# EAGLE board CC_Chompi_Rev4_1X1 (EAGLE 9.6.2), part 1 of 3
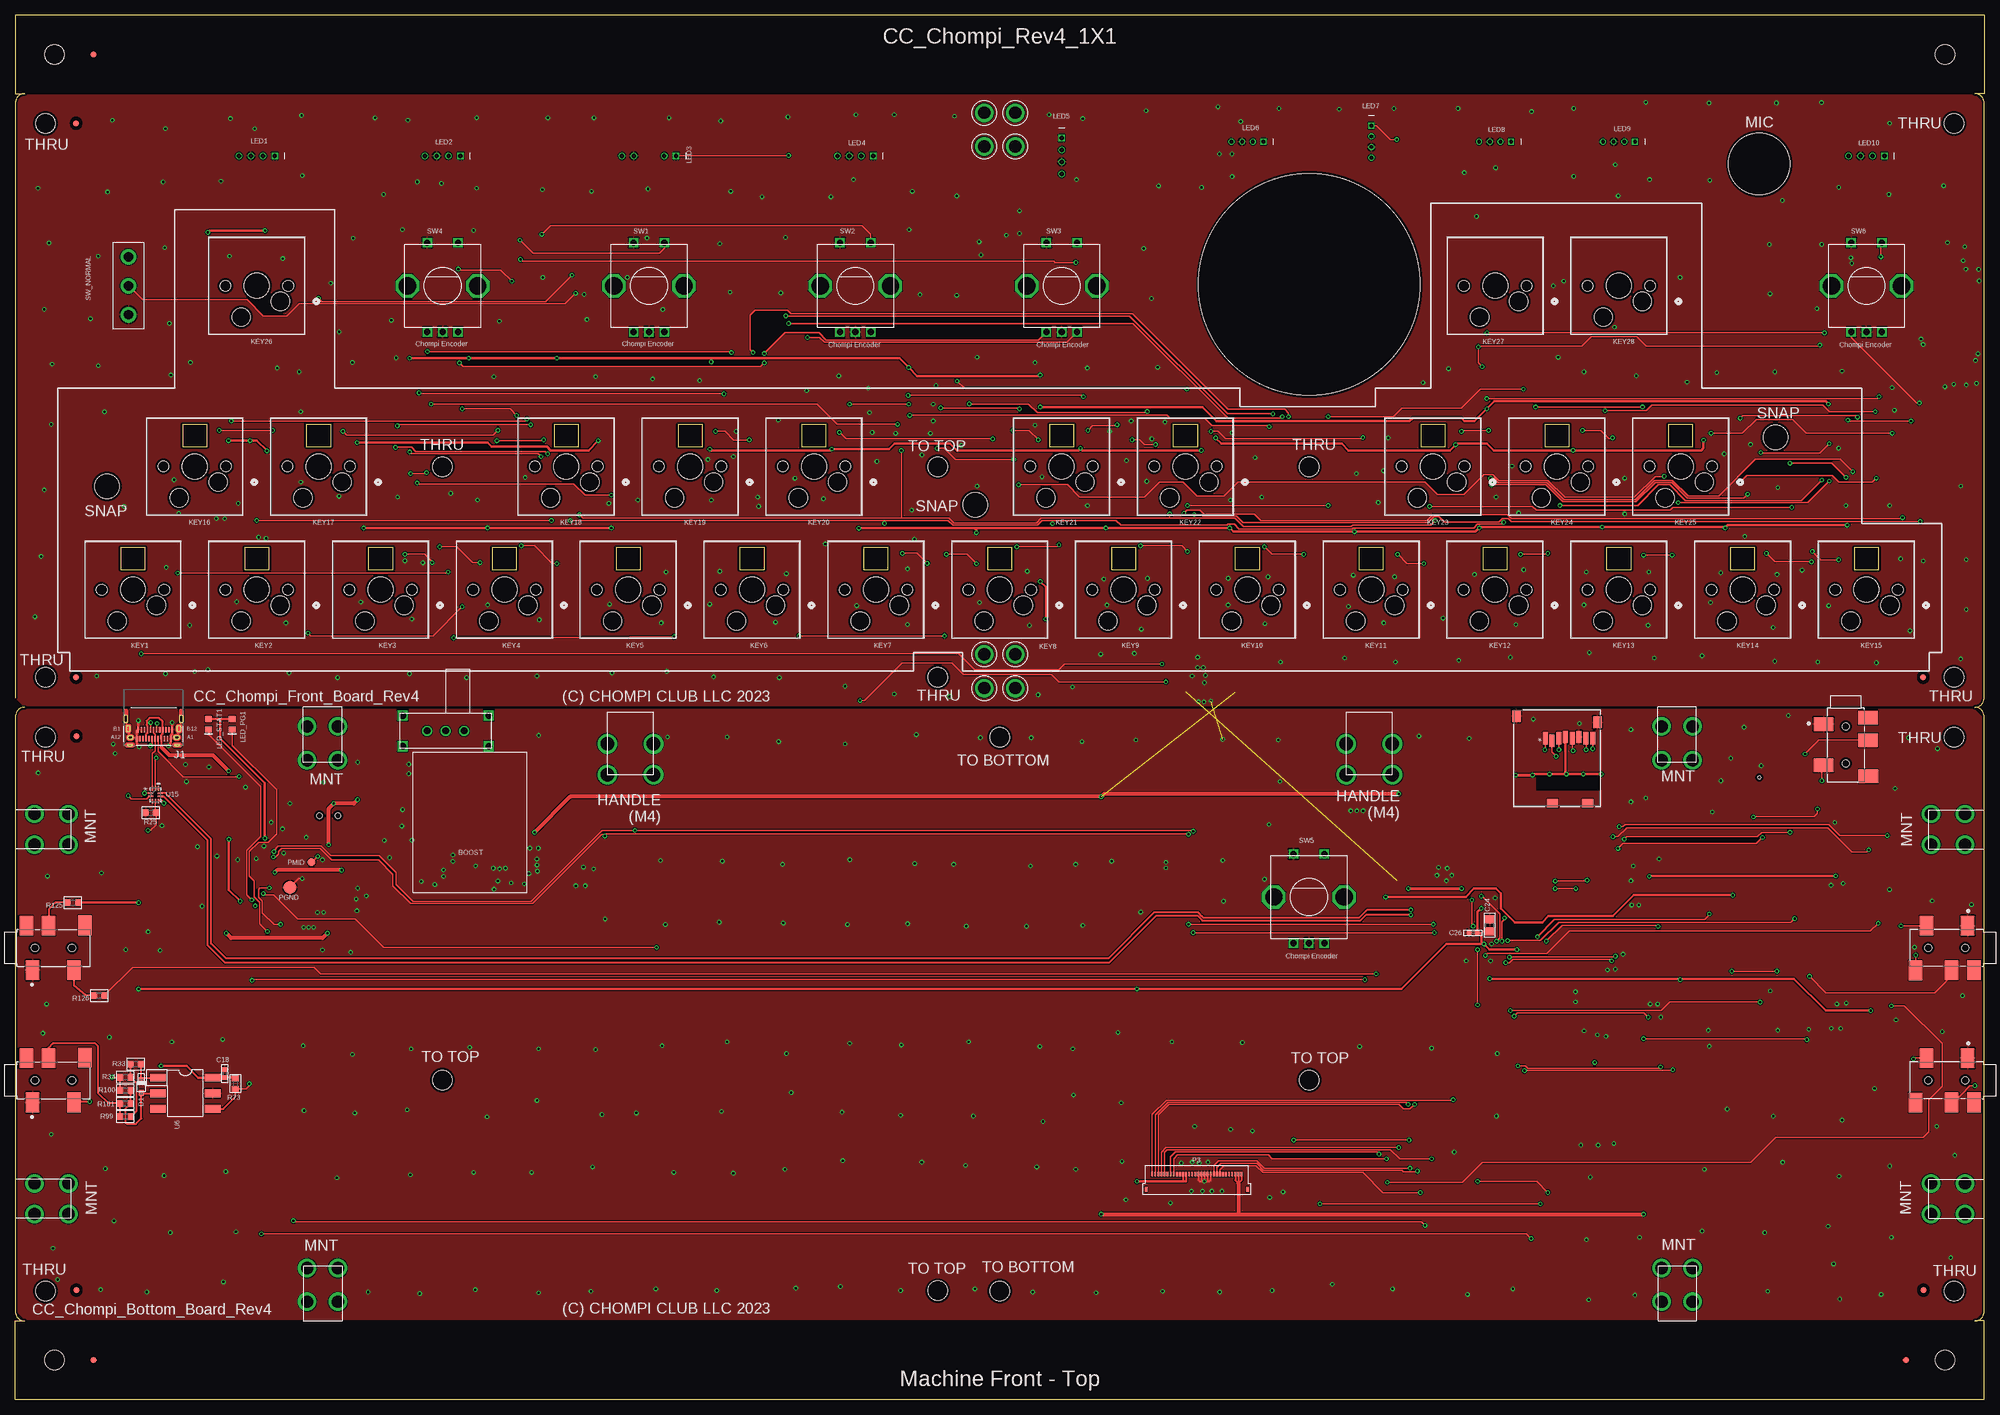
[diagram p0: board, top side]
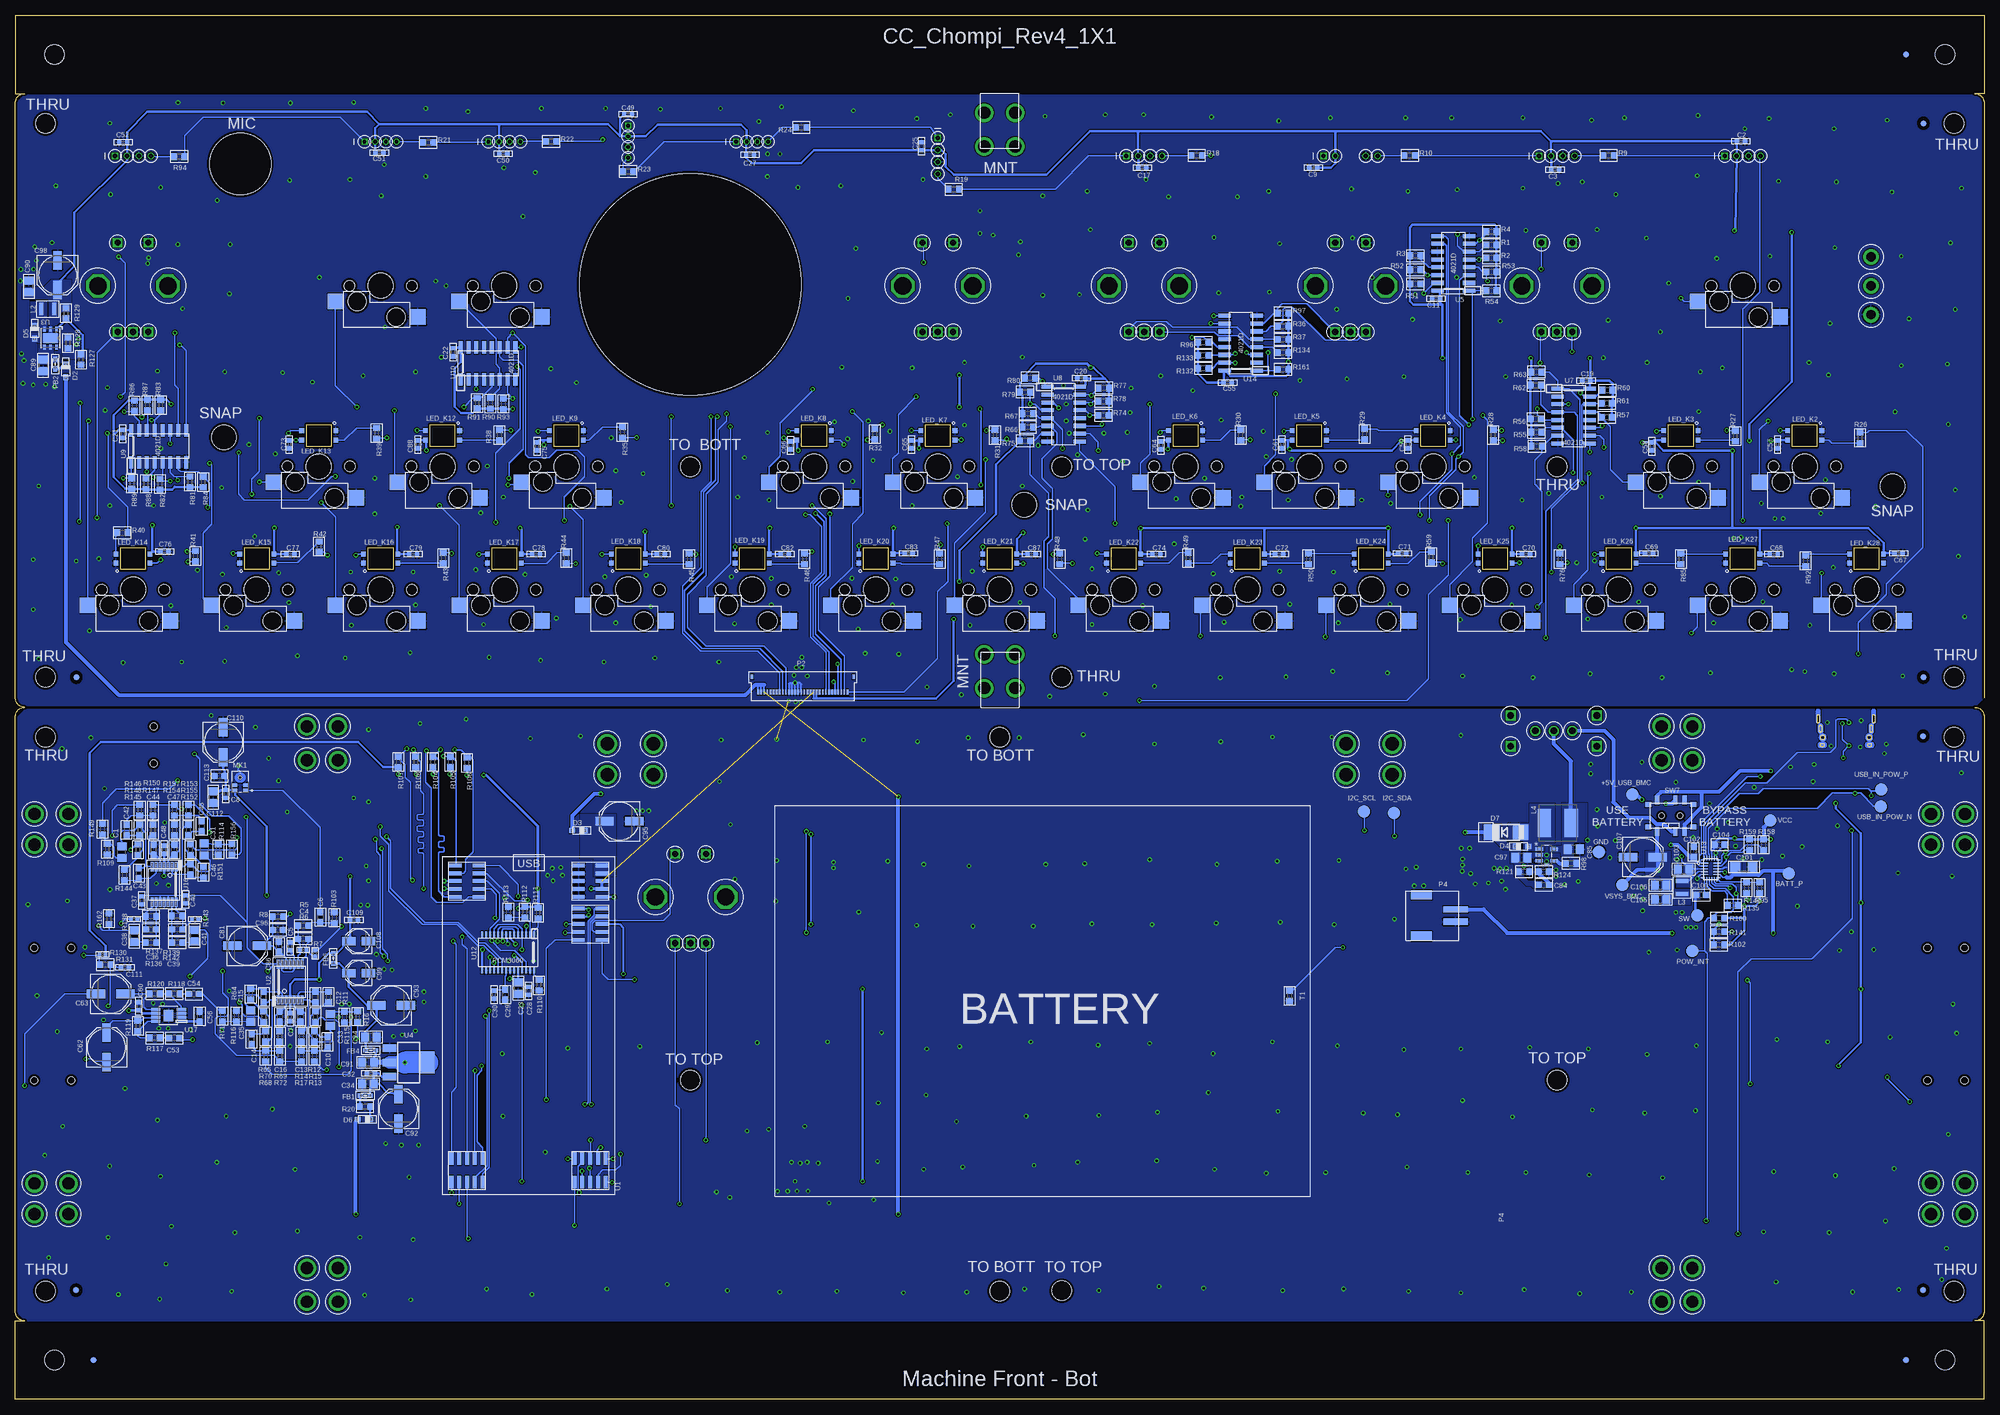
[diagram p1: board, bottom side, seen from below]

Size 319.75 x 224.76 mm. Coordinates in mm from the lower left corner, seen from the top.
Outline: 0,113.88 0,210.56 arc-90 1.5,212.06 0,212.06 0,224.76 319.75,224.76 319.75,212.06 318.25,212.06 arc-90 319.75,210.56 319.75,113.88 arc-90 318.25,112.38 arc-90 319.75,110.88 319.75,14.2 arc-90 318.25,12.7 319.75,12.7 319.75,0 0,0 0,12.7 1.5,12.7 arc-90 0,14.2 0,110.88 arc-90 1.5,112.38
Copper layers (1*16): Top 0.0356mm / dielectric 1.5011mm / Bottom 0.0356mm
Design rules "ES_DRC_MaskedVias *": minimum track width 6mil, minimum drill 13mil, track to track 6mil, track to pad 6mil, pad to pad 6mil, via to via 6mil, smd to smd 6mil, copper to edge 15mil, drill to drill 6mil, minimum pad ring 7mil, minimum via ring 7mil, stop-mask expansion 3mil, vias tented up to drill 16mil, thermal gap 10mil
Net classes: 0 default: width 0.102 mm, drill 0.2 mm
Holes 3.2 mm at 4.87,107.54 4.87,17.54 314.87,17.54 314.87,107.54 69.37,51.79 210.15,51.79 149.83,17.6 4.87,207.22 4.87,117.22 314.87,117.22 314.87,207.22 69.37,151.47 149.82,151.47 210.15,151.47 149.81,117.23 159.87,107.54 159.87,17.54
Holes 36 mm at 210.16,181.09
Holes 10 mm at 283.23,200.63
Holes 4 mm at 14.87,148.24 155.87,145.24 285.87,156.24
Holes 3.17 mm at 6.35,6.35 313.4,6.35 6.35,218.41 313.4,218.41

## Footprints (pad centres in the part's own frame; a part is rotated, then mirrored left to right if it is on the bottom)
C0805 = smd 1.3 x 1.5: 1 -0.95,0; 2 0.95,0
C0402 = smd 0.7 x 0.9: 1 -0.65,0; 2 0.65,0
C0603 = smd 1.1 x 1: 1 -0.85,0; 2 0.85,0
PANASONIC_D = smd 3 x 1.4: + 2.4,0; - -2.4,0
PANASONIC_B = smd 2.2 x 1.4: + 1.6,0; - -1.6,0
C1206 = smd 1.6 x 1.8: 1 -1.4,0; 2 1.4,0
SOD-323F = smd 1 x 0.8: A 1,0; C -1,0
SMADIODE = smd 2.54 x 2.54: A 2.349,0; C -2.349,0
WUERTH-ELEKTRONIK_0603 = smd 0.85 x 0.7: 1 -0.9,0; 2 0.7,0
FIDUCIAL_1MM = smd 1 x 1: 1 0,0
M4_SCREW_TERMINAL = drill 2.2: P$1 -3.75,-1.75; P$2 3.75,-1.75; P$3 -3.75,3.25; P$4 3.75,3.25
ADAM_USB-C31-S-RA-CS2-SMT-BK-T/R = smd 0.25 x 0.9: A1 -2.75,0.23; A2 -2.25,0.23; A3 -1.75,0.23; A4 -1.25,0.23; A5 -0.75,0.23; A6 -0.25,0.23; A7 0.25,0.23; A8 0.75,0.23; A9 1.25,0.23; A10 1.75,0.23; A11 2.25,0.23; A12 2.75,0.23; B1 2.5,-1.26; B2 2,-1.26; B3 1.5,-1.26; B4 1,-1.26; B5 0.5,-1.26; B6 0,-1.26; B7 -0.5,-1.26; B8 -1,-1.26; B9 -1.5,-1.26; B10 -2,-1.26; B11 -2.5,-1.26; B12 -3,-1.26
CUI_SJ2-35863B1-SMT-TR = smd 2.2 x 3.2: 1 -3.4,-3.6; 2 3.3,-3.6; 3 -0.8,3.6; 4 -4.4,3.6; 10 5.1,3.65 | hole 1.2: -3,0; 3,0
CPG151101S11 = smd 2.55 x 2.5: P$1 -3.525,0; P$2 9.875,-2.54 | hole 3: 6.35,-2.54; 0,0 | hole 4.089: 3.81,2.54 | hole 1.753: 8.89,2.54; -1.27,2.54
I1008 = smd 0.7 x 2: 1 1.05,0; 2 -1.05,0
MPL-SE6040 = smd 4.5 x 2.15: P$1 0,2.175; P$2 0,-2.175
WS2812D-F8 = drill 0.7: DIN -2.9,0; GND -0.967,0; VDD 0.967,0 | drill 0.7 square: DOUT 2.9,0
WS2812D-F8-SPLIT = drill 0.7: DIN -4.4,0; GND -2.467,0; VDD 2.467,0 | drill 0.7 square: DOUT 4.4,0
WS2812D-F5 = drill 0.6: DIN -2.6,0; GND -0.867,0; VDD 0.867,0 | drill 0.6 square: DOUT 2.6,0
IN-PI32TAR = smd 0.75 x 0.82: DIN -2.775,0.755; DO 2.775,-0.755; GND -2.775,-0.755; VDD 2.775,0.755
DIODE_0603 = smd 1 x 1.1: ANODE 0.85,0; CATHODE -0.85,0
MIC_MP23ABS1TR = smd 0.725 x 0.522: 1 -0.838,1.364; 2 -0.838,0.542; 4 0.838,0.542; 5 0.838,1.364 | smd 0.1 x 0.1: 3 0,-1.373 | hole 0.5: 0,-0.71
FH34SRJ-30S-0-5SH-50 = smd 0.3 x 0.8: P$1 -7.25,0; P$2 -6.75,0; P$3 -6.25,0; P$4 -5.75,0; P$5 -5.25,0; P$6 -4.75,0; P$7 -4.25,0; P$8 -3.75,0; P$9 -3.25,0; P$10 -2.75,0; P$11 -2.25,0; P$12 -1.75,0; P$13 -1.25,0; P$14 -0.75,0; P$15 -0.25,0; P$16 0.25,0; P$17 0.75,0; P$18 1.25,0; P$19 1.75,0; P$20 2.25,0; P$21 2.75,0; P$22 3.25,0; P$23 3.75,0; P$24 4.25,0; P$25 4.75,0; P$26 5.25,0; P$27 5.75,0; P$28 6.25,0; P$29 6.75,0; P$30 7.25,0 | smd 0.4 x 0.8: P$31 -8.25,-2.5; P$32 8.25,-2.5
S2B-PH-SM4-TB(LF)(SN) = smd 1 x 4: P_1 -1,-1.05; P_2 1,-1.05 | smd 1.5 x 3.4: P_3 -3.35,4.5; P_4 3.35,4.5
MEM2061-01-188-00-A_GCT = smd 1.803 x 1.397: 9 -4.95,7.322; 10 0.75,7.322 | smd 1.397 x 1.905: 11 -6.55,-5.828; 12 6.6,-6.828 | smd 0.813 x 2.007: P1 1.94,-3.228; P2 0.84,-2.828; P3 -0.26,-3.228; P4 -1.36,-3.428; P5 -2.46,-3.228; P6 -3.56,-3.428; P7 -4.66,-3.228; P8 -5.76,-3.228
R0603 = smd 1 x 1.1: 1 -0.85,0; 2 0.85,0
R0402 = smd 0.6 x 0.7: 1 -0.5,0; 2 0.5,0
SK-12F17-G7 = drill 1.1: P$1 0,0; P$2 -3,0; P$3 3,0 | drill 1.1 square: P$4 -7,2.5; P$5 7,2.5; P$7 -7,-2.5; P$8 7,-2.5
T34069_OLD = drill 2: P$1 -2.5,2.75; P$2 2.5,2.75; P$3 -2.5,-2.75; P$4 2.5,-2.75
T34069_OLD_ADJ2 = drill 2: P$1 -2.5,2.75; P$2 2.5,2.75; P$3 -2.5,-2.75; P$4 2.5,-2.75
T34069_OLD_ADJ1 = drill 2: P$1 -2.5,2.75; P$2 2.5,2.75; P$3 -2.5,-2.75; P$4 2.5,-2.75
PEC11_SILK = drill 1 pad 1.524 square: A -2.5,-7.5; B 2.5,-7.5; C 0,-7.5; D -2.5,7; E 2.5,7 | drill 2.8 pad 3.81 octagon: GND1 -5.7,0; GND2 5.7,0
MSS6-V-T/R = smd 1 x 0.8: 1 -3.65,1.8; 2 3.65,1.8; 3 -3.65,-1.8; 4 3.65,-1.8 | smd 0.7 x 1.5: A -2.25,2.55; B 0.75,2.55; C 2.25,2.55; D -2.25,-2.55; E 0.75,-2.55; F 2.25,-2.55 | hole 0.9: -1.5,0; 1.5,0
ES_100SP1T6B11M2QEH_SMALL = drill 1.5 pad 2.54: O -4.699,0; P 0,0; S 4.699,0
TP20R = smd 2 x 2: TP 0,0
TP13R = smd 1.3 x 1.3: TP 0,0
ES_DAISY_SEED2_DFM_REV1 = smd 0.65 x 1.98: A1 53.54,2.095; A2 52.27,2.095; A3 51,2.095; A4 49.73,2.095; A5 48.46,2.095; A6 48.46,5.905; A7 49.73,5.905; A8 51,5.905; A9 52.27,5.905; A10 53.54,5.905; B1 46.54,2.095; B2 45.27,2.095; B3 44,2.095; B4 42.73,2.095; B5 41.46,2.095; B6 41.46,5.905; B7 42.73,5.905; B8 44,5.905; B9 45.27,5.905; B10 46.54,5.905; E1 53.54,22.095; E2 52.27,22.095; E3 51,22.095; E4 49.73,22.095; E5 48.46,22.095; E6 48.46,25.905; E7 49.73,25.905; E8 51,25.905; E9 52.27,25.905; E10 53.54,25.905 | smd 1.98 x 0.65: C1 5.905,6.54; C2 5.905,5.27; C3 5.905,4; C4 5.905,2.73; C5 5.905,1.46; C6 2.095,1.46; C7 2.095,2.73; C8 2.095,4; C9 2.095,5.27; C10 2.095,6.54; D1 5.905,26.54; D2 5.905,25.27; D3 5.905,24; D4 5.905,22.73; D5 5.905,21.46; D6 2.095,21.46; D7 2.095,22.73; D8 2.095,24; D9 2.095,25.27; D10 2.095,26.54
TSSOP-14 = smd 0.45 x 1.5: 1 -1.95,-2.9; 2 -1.3,-2.9; 3 -0.65,-2.9; 4 0,-2.9; 5 0.65,-2.9; 6 1.3,-2.9; 7 1.95,-2.9; 8 1.95,2.9; 9 1.3,2.9; 10 0.65,2.9; 11 0,2.9; 12 -0.65,2.9; 13 -1.3,2.9; 14 -1.95,2.9
DFN06_3X3_STM = smd 0.813 x 0.406: 1 -1.448,0.95; 2 -1.448,0; 3 -1.448,-0.95; 4 1.448,-0.95; 5 1.448,0; 6 1.448,0.95 | smd 1.6 x 2.413: 7 0,0
SOT223 = smd 2.235 x 1.219: 1 3.099,-2.311; 2 3.099,0; 3 3.099,2.311 | smd 2.2 x 3.6: TAB -3.099,0
SO-16 = smd 0.66 x 2.032: 1 -4.445,-2.591; 2 -3.175,-2.591; 3 -1.905,-2.591; 4 -0.635,-2.591; 5 0.635,-2.591; 6 1.905,-2.591; 7 3.175,-2.591; 8 4.445,-2.591; 9 4.445,2.591; 10 3.175,2.591; 11 1.905,2.591; 12 0.635,2.591; 13 -0.635,2.591; 14 -1.905,2.591; 15 -3.175,2.591; 16 -4.445,2.591
DIL06_GULLWING = smd 1.27 x 2.54: 1 -2.54,-4.445; 2 0,-4.445; 3 2.54,-4.445; 4 2.54,4.445; 5 0,4.445; 6 -2.54,4.445
MF05A = smd 1.27 x 0.559: 1 -1.219,0.953; 2 -1.219,0; 3 -1.219,-0.953; 4 1.219,-0.953; 5 1.219,0.953
TSSOP-28 = smd 0.305 x 0.991: 1 -4.225,-2.918; 2 -3.575,-2.918; 3 -2.925,-2.918; 4 -2.275,-2.918; 5 -1.625,-2.918; 6 -0.975,-2.918; 7 -0.325,-2.918; 8 0.325,-2.918; 9 0.975,-2.918; 10 1.625,-2.918; 11 2.275,-2.918; 12 2.925,-2.918; 13 3.575,-2.918; 14 4.225,-2.918; 15 4.225,2.918; 16 3.575,2.918; 17 2.925,2.918; 18 2.275,2.918; 19 1.625,2.918; 20 0.975,2.918; 21 0.325,2.918; 22 -0.325,2.918; 23 -0.975,2.918; 24 -1.625,2.918; 25 -2.275,2.918; 26 -2.925,2.918; 27 -3.575,2.918; 28 -4.225,2.918
MP2722 = smd 0.2 x 0.7: AGND 0.6,1.7; BST -1,-1.7; CC2 -1,1.7; D+ -0.6,1.7; D- -0.2,1.7; INT -0.2,-1.7; NTC1 0.6,-1.7; PG/NTC2 0.2,-1.7; RST 1,1.7; STAT/IB 1,-1.7; VCC 0.2,1.7; VRNTC -0.6,-1.7 | smd 1.1 x 0.2: BATT 1,0; BATTSNS 1,-0.9; IN -1,0.45; PGND -1,-0.9; PMID -1,0; SCL 1,0.9; SDA 1,0.45; SW -1,-0.45; SYS 1,-0.45 | smd 0.5 x 0.2: BST_2 -1.3,-1.45; CC2_2 -1.3,1.45; RST_2 1.3,1.45; STAT/IB_2 1.3,-1.45 | smd 1.2 x 0.2: CC1 -0.95,0.9
QFN10_1P6X2P1MC_MCH = smd 0.254 x 0.762: 1 0,1.029; 2 -0.508,1.029; 5 -0.508,-1.029; 6 0,-1.029; 7 0.508,-1.029; 10 0.508,1.029 | smd 0.762 x 0.254: 3 -0.775,0.254; 4 -0.775,-0.254; 8 0.775,-0.254; 9 0.775,0.254
MSOP_8_PWRPAD = smd 1.6 x 0.4: 1 -2.095,0.975; 2 -2.095,0.325; 3 -2.095,-0.325; 4 -2.095,-0.975; 5 2.095,-0.975; 6 2.095,-0.325; 7 2.095,0.325; 8 2.095,0.975 | smd 1.57 x 1.89: 9 0,0

## Placement (x,y rotation side)
C1  10UF  [C0805]  302.45,88.82 90 bottom
C2  100NF  [C0402]  39.49,204.29 0 bottom
C3  100NF  [C0402]  69.66,199.72 0 bottom
C4  47PF  [C0603]  273,74.77 180 bottom
C5  100NF  [C0402]  275.13,73.55 270 bottom
C6  1UF  [C0603]  270.23,78.27 270 bottom
C7  100NF  [C0402]  275.15,62.04 270 bottom
C8  100NF  [C0402]  285.59,98.29 270 bottom
C9  100NF  [C0402]  108.95,200 180 bottom
C10  1.5NF  [C0603]  269.04,58.01 90 bottom
C11  100NF  [C0402]  89.02,178.77 180 bottom
C12  470pF  [C0603]  271.02,65.32 90 bottom
C13  470pF  [C0603]  273.46,62.12 270 bottom
C14  1.5NF  [C0603]  281.38,58.46 90 bottom
C15  470pF  [C0603]  279.4,65.32 90 bottom
C16  470pF  [C0603]  276.81,62.12 270 bottom
C17  100NF  [C0402]  136.72,200.02 0 bottom
C18  100NF  [C0402]  34.01,52.88 270 top
C19  100NF  [C0402]  64.64,165.46 180 bottom
C20  100NF  [C0402]  146.63,165.86 180 bottom
C21  100NF  [C0402]  302.31,156.79 270 bottom
C22  100NF  [C0402]  248.66,170.05 270 bottom
C23  10UF  [C0805]  238.06,66.76 270 bottom
C24  10UF  [C0805]  239.45,76.95 90 top
C25  100NF  [C0402]  172.59,203.53 90 bottom
C26  100NF  [C0402]  236.74,75.75 180 top
C27  100NF  [C0402]  200.42,202.16 0 bottom
C28  100NF  [C0402]  236.38,66.3 270 bottom
C29  2.2UF  [C0603]  240.19,65.7 270 bottom
C30  100NF  [C0402]  242.02,65.7 270 bottom
C31  10UF  [C0805]  289.09,89.28 270 bottom
C32  100NF  [C0402]  262.02,52.92 180 bottom
C33  10UF  [C0805]  268.6,61.59 270 bottom
C34  10UF  [C0805]  262.47,51.21 180 bottom
C35  10UF  [C0805]  281.55,62.2 90 bottom
C36  330PF  [C0603]  297.72,76.28 0 bottom
C37  100NF  [C0402]  299.25,81.01 90 bottom
C38  10UF  [C0805]  300.47,75.22 270 bottom
C39  330PF  [C0603]  293.46,76.28 180 bottom
C40  100NF  [C0402]  292.09,81.16 90 bottom
C41  10UF  [C0805]  290.66,75.27 270 bottom
C42  1.5NF  [C0603]  301.69,92.44 270 bottom
C43  470pF  [C0603]  299.71,85.43 270 bottom
C44  470pF  [C0603]  297.27,89.24 90 bottom
C45  1.5NF  [C0603]  289.5,93.05 270 bottom
C46  470pF  [C0603]  291.32,86.04 270 bottom
C47  470pF  [C0603]  293.91,89.24 90 bottom
C48  100NF  [C0402]  295.59,89.24 90 bottom
C49  100NF  [C0402]  220.24,208.71 0 bottom
C50  100NF  [C0402]  240.5,202.31 0 bottom
C51  100NF  [C0402]  260.62,202.46 0 bottom
C52  100NF  [C0402]  302.23,204.14 180 bottom
C53  470NF  [C0603]  293.95,58.63 180 bottom
C54  470NF  [C0603]  290.75,65.79 180 bottom
C55  100NF  [C0402]  122.85,165.12 0 bottom
C56  1UF  [C0603]  289.81,62.14 270 bottom
C57  100NF  [C0402]  33.55,155.06 270 bottom
C58  100NF  [C0402]  53.97,154.76 270 bottom
C59  100NF  [C0402]  93.59,155.06 270 bottom
C60  100NF  [C0402]  299.71,63.82 270 bottom
C61  100NF  [C0402]  114.01,155.06 270 bottom
C62  100UF  [PANASONIC_D]  304.93,57.14 90 bottom
C63  100UF  [PANASONIC_D]  304.29,65.83 0 bottom
C64  100NF  [C0402]  133.67,154.91 270 bottom
C65  100NF  [C0402]  174.21,155.06 270 bottom
C66  100NF  [C0402]  193.87,154.91 270 bottom
C67  100NF  [C0402]  13.89,137.39 0 bottom
C68  100NF  [C0402]  34.16,137.23 0 bottom
C69  100NF  [C0402]  54.42,137.39 0 bottom
C70  100NF  [C0402]  74.39,137.23 0 bottom
C71  100NF  [C0402]  94.51,137.39 0 bottom
C72  100NF  [C0402]  114.47,137.23 0 bottom
C73  100NF  [C0402]  275.25,155.06 270 bottom
C74  100NF  [C0402]  134.43,137.23 0 bottom
C75  100NF  [C0402]  235.02,154.76 270 bottom
C76  100NF  [C0402]  295.52,137.69 0 bottom
C77  100NF  [C0402]  275.1,137.23 0 bottom
C78  100NF  [C0402]  235.17,137.23 0 bottom
C79  100NF  [C0402]  255.13,137.23 0 bottom
C80  100NF  [C0402]  214.9,137.23 0 bottom
C81  100UF  [PANASONIC_D]  282.13,73.63 0 bottom
C82  100NF  [C0402]  194.78,137.23 0 bottom
C83  100NF  [C0402]  174.67,137.39 0 bottom
C84  220PF  [C0603]  71.51,83.52 0 bottom
C85  10UF  [C0805]  66.64,89.32 0 bottom
C86  470NF  [C0603]  276.95,73.47 270 bottom
C87  100NF  [C0402]  154.7,137.23 0 bottom
C88  100NF  [C0402]  254.37,155.06 270 bottom
C89  10UF  [C0805]  315.26,167.92 270 bottom
C90  10UF  [C0805]  317.54,180.72 90 bottom
C91  10UF  [C0805]  262.44,54.68 180 bottom
C92  100UF  [PANASONIC_D]  257.52,47.14 90 bottom
C93  100UF  [PANASONIC_D]  258.69,63.95 180 bottom
C94  10UF  [C0805]  261.99,58.79 0 bottom
C95  100UF  [PANASONIC_D]  221.65,93.85 180 bottom
C96  470NF  [C0603]  277.1,76.22 180 bottom
C97  10UF  [C0805]  75.17,87.94 0 bottom
C98  100UF  [PANASONIC_D]  312.91,182.57 270 bottom
C99  10UF  [PANASONIC_B]  263.99,69.21 180 bottom
C100  22NF  [C0603]  45.95,81.87 180 bottom
C101  22UF  [C1206]  39.01,86.47 180 bottom
C102  1UF  [C0603]  47.17,88.88 90 bottom
C103  10UF  [C0805]  48.79,86.06 0 bottom
C104  4.7UF  [C0603]  42.98,90.05 0 bottom
C105  10UF  [C0805]  52.56,81.18 180 bottom
C106  10UF  [C0805]  52.56,83.47 180 bottom
C107  100UF  [PANASONIC_D]  55.41,88.03 0 bottom
C108  10UF  [PANASONIC_B]  263.99,74.39 180 bottom
C109  100NF  [C0402]  264.76,77.84 0 bottom
C110  100UF DNI  [PANASONIC_D]  285.99,106.7 270 bottom
C111  100NF  [C0402]  301.94,70.12 0 bottom
C112  10UF  [C0805]  287.62,97.76 270 bottom
C113  1UF  [C0603]  286.6,101.21 180 bottom
D1  NSR1020MW2T3G  [SOD-323F]  20.44,50.75 270 top
D2  NSR1020MW2T3G  [SOD-323F]  311.56,167 270 bottom
D3  NSR1020MW2T3G  [SOD-323F]  228.32,92.36 180 bottom
D4  NSR1020MW2T3G  [SOD-323F]  75.02,89.77 0 bottom
D5  NSR1020MW2T3G  [SOD-323F]  316.63,173.26 270 bottom
D6  NSR1020MW2T3G  [SOD-323F]  263.14,45.45 180 bottom
D7  B220A-13-F DNI  [SMADIODE]  77.61,92.06 0 bottom
FB1  FERRITE_BEAD_0603  [WUERTH-ELEKTRONIK_0603]  262.81,49.31 0 bottom
FB2  FERRITE_BEAD_0603  [WUERTH-ELEKTRONIK_0603]  313.28,168.23 90 bottom
FB4  FERRITE_BEAD_0603  [WUERTH-ELEKTRONIK_0603]  262.14,56.66 180 bottom
FB6  FERRITE_BEAD_0603  [WUERTH-ELEKTRONIK_0603]  268.11,71.49 270 bottom
FD1  FIDUCIAL  [FIDUCIAL_1MM]  9.87,207.24 0 top
FD2  FIDUCIAL  [FIDUCIAL_1MM]  9.87,117.24 0 top
FD3  FIDUCIAL  [FIDUCIAL_1MM]  309.87,117.24 0 top
FD4  FIDUCIAL  [FIDUCIAL_1MM]  9.87,207.24 0 bottom
FD5  FIDUCIAL  [FIDUCIAL_1MM]  9.87,117.24 0 bottom
FD6  FIDUCIAL  [FIDUCIAL_1MM]  309.87,117.24 0 bottom
FD7  FIDUCIAL  [FIDUCIAL_1MM]  9.88,107.7 0 top
FD8  FIDUCIAL  [FIDUCIAL_1MM]  9.88,17.7 0 top
FD9  FIDUCIAL  [FIDUCIAL_1MM]  309.88,17.7 0 top
FD10  FIDUCIAL  [FIDUCIAL_1MM]  9.88,107.7 0 bottom
FD11  FIDUCIAL  [FIDUCIAL_1MM]  9.88,17.7 0 bottom
FD12  FIDUCIAL  [FIDUCIAL_1MM]  309.88,17.7 0 bottom
FDB1  [FIDUCIAL_1MM]  12.7,218.41 0 bottom
FDB2  [FIDUCIAL_1MM]  12.7,6.35 0 bottom
FDB3  [FIDUCIAL_1MM]  307.05,6.35 0 bottom
FDT1  [FIDUCIAL_1MM]  12.7,218.41 0 top
FDT2  [FIDUCIAL_1MM]  12.7,6.35 0 top
FDT3  [FIDUCIAL_1MM]  307.05,6.35 0 top
HANDLE_1  SCREW_TERMINALM4  [M4_SCREW_TERMINAL]  219.88,103.18 0 top
HANDLE_2  SCREW_TERMINALM4  [M4_SCREW_TERMINAL]  99.89,103.18 0 top
J1  USB-C31-S-RA-CS2-SMT-BK-T/R  [ADAM_USB-C31-S-RA-CS2-SMT-BK-T/R]  22.44,107.48 180 top
J_AUDIO_IN  PJ-3062-HD-R  [CUI_SJ2-35863B1-SMT-TR]  313.69,73.3 180 top
J_AUDIO_OUT  PJ-3062-HD-B  [CUI_SJ2-35863B1-SMT-TR]  297.29,106.25 270 top
J_HP_OUT  PJ-3062-G  [CUI_SJ2-35863B1-SMT-TR]  313.69,51.8 180 top
J_MIDI_IN  PJ-3062-HD-B  [CUI_SJ2-35863B1-SMT-TR]  6.18,51.8 0 top
J_MIDI_OUT  PJ-3062-HD-B  [CUI_SJ2-35863B1-SMT-TR]  6.18,73.3 0 top
KEY1  MX3A-L1NB_SOCKET  [CPG151101S11]  22.91,128.94 0 bottom
KEY2  MX3A-L1NB_SOCKET  [CPG151101S11]  43.02,128.94 0 bottom
KEY3  MX3A-L1NB_SOCKET  [CPG151101S11]  63.13,128.94 0 bottom
KEY4  MX3A-L1NB_SOCKET  [CPG151101S11]  83.24,128.94 0 bottom
KEY5  MX3A-L1NB_SOCKET  [CPG151101S11]  103.35,128.94 0 bottom
KEY6  MX3A-L1NB_SOCKET  [CPG151101S11]  123.46,128.94 0 bottom
KEY7  MX3A-L1NB_SOCKET  [CPG151101S11]  143.57,128.94 0 bottom
KEY8  MX3A-L1NB_SOCKET  [CPG151101S11]  163.68,128.94 0 bottom
KEY9  MX3A-L1NB_SOCKET  [CPG151101S11]  183.79,128.94 0 bottom
KEY10  MX3A-L1NB_SOCKET  [CPG151101S11]  203.91,128.94 0 bottom
KEY11  MX3A-L1NB_SOCKET  [CPG151101S11]  224.02,128.94 0 bottom
KEY12  MX3A-L1NB_SOCKET  [CPG151101S11]  244.13,128.94 0 bottom
KEY13  MX3A-L1NB_SOCKET  [CPG151101S11]  264.24,128.94 0 bottom
KEY14  MX3A-L1NB_SOCKET  [CPG151101S11]  284.35,128.94 0 bottom
KEY15  MX3A-L1NB_SOCKET  [CPG151101S11]  304.46,128.94 0 bottom
KEY16  MX3A-L1NB_SOCKET  [CPG151101S11]  32.95,148.94 0 bottom
KEY17  MX3A-L1NB_SOCKET  [CPG151101S11]  53.07,148.94 0 bottom
KEY18  MX3A-L1NB_SOCKET  [CPG151101S11]  93.29,148.94 0 bottom
KEY19  MX3A-L1NB_SOCKET  [CPG151101S11]  113.4,148.94 0 bottom
KEY20  MX3A-L1NB_SOCKET  [CPG151101S11]  133.51,148.94 0 bottom
KEY21  MX3A-L1NB_SOCKET  [CPG151101S11]  173.73,148.94 0 bottom
KEY22  MX3A-L1NB_SOCKET  [CPG151101S11]  193.84,148.94 0 bottom
KEY23  MX3A-L1NB_SOCKET  [CPG151101S11]  234.07,148.94 0 bottom
KEY24  MX3A-L1NB_SOCKET  [CPG151101S11]  254.18,148.94 0 bottom
KEY25  MX3A-L1NB_SOCKET  [CPG151101S11]  274.29,148.94 0 bottom
KEY26  MX3A-L1NB_SOCKET  [CPG151101S11]  43.03,178.3 0 bottom
KEY27  MX3A-L1NB_SOCKET  [CPG151101S11]  244.14,178.3 0 bottom
KEY28  MX3A-L1NB_SOCKET  [CPG151101S11]  264.26,178.3 0 bottom
L2  7848324033-3UH  [I1008]  314.49,177.07 180 bottom
L3  7848324033-3UH  [I1008]  49.05,83.12 270 bottom
L4  6.8UH  [MPL-SE6040]  69.26,93.57 270 bottom
LED1  WS2812D-F8  [WS2812D-F8]  39.22,201.93 0 top
LED2  WS2812D-F8  [WS2812D-F8]  69.38,201.93 0 top
LED3  DIGITAL_LEDWS2812D-F8-SPLIT  [WS2812D-F8-SPLIT]  102.9,201.93 0 top
LED4  WS2812D-F8  [WS2812D-F8]  136.42,201.93 0 top
LED5  WS2812D-F8  [WS2812D-F8]  169.94,201.93 90 top
LED6  DIGITAL_LEDWS2812D-F5  [WS2812D-F5]  200.11,204.24 0 top
LED7  DIGITAL_LEDWS2812D-F5  [WS2812D-F5]  220.22,204.24 90 top
LED8  DIGITAL_LEDWS2812D-F5  [WS2812D-F5]  240.33,204.24 0 top
LED9  DIGITAL_LEDWS2812D-F5  [WS2812D-F5]  260.44,204.24 0 top
LED10  WS2812D-F8  [WS2812D-F8]  300.65,201.93 0 top
LED_K2  Digital LED Reverse Mount  [IN-PI32TAR]  29.14,156.53 180 bottom
LED_K3  Digital LED Reverse Mount  [IN-PI32TAR]  49.26,156.53 180 bottom
LED_K4  Digital LED Reverse Mount  [IN-PI32TAR]  89.48,156.53 180 bottom
LED_K5  Digital LED Reverse Mount  [IN-PI32TAR]  109.59,156.53 180 bottom
LED_K6  Digital LED Reverse Mount  [IN-PI32TAR]  129.7,156.53 180 bottom
LED_K7  Digital LED Reverse Mount  [IN-PI32TAR]  169.92,156.53 180 bottom
LED_K8  Digital LED Reverse Mount  [IN-PI32TAR]  190.03,156.53 180 bottom
LED_K9  Digital LED Reverse Mount  [IN-PI32TAR]  230.26,156.53 180 bottom
LED_K12  Digital LED Reverse Mount  [IN-PI32TAR]  250.37,156.53 180 bottom
LED_K13  Digital LED Reverse Mount  [IN-PI32TAR]  270.48,156.53 180 bottom
LED_K14  Digital LED Reverse Mount  [IN-PI32TAR]  300.65,136.53 0 bottom
LED_K15  Digital LED Reverse Mount  [IN-PI32TAR]  280.54,136.53 0 bottom
LED_K16  Digital LED Reverse Mount  [IN-PI32TAR]  260.43,136.53 0 bottom
LED_K17  Digital LED Reverse Mount  [IN-PI32TAR]  240.32,136.53 0 bottom
LED_K18  Digital LED Reverse Mount  [IN-PI32TAR]  220.21,136.53 0 bottom
LED_K19  Digital LED Reverse Mount  [IN-PI32TAR]  200.09,136.53 0 bottom
LED_K20  Digital LED Reverse Mount  [IN-PI32TAR]  179.98,136.53 0 bottom
LED_K21  Digital LED Reverse Mount  [IN-PI32TAR]  159.87,136.53 0 bottom
LED_K22  Digital LED Reverse Mount  [IN-PI32TAR]  139.76,136.53 0 bottom
LED_K23  Digital LED Reverse Mount  [IN-PI32TAR]  119.65,136.53 0 bottom
LED_K24  Digital LED Reverse Mount  [IN-PI32TAR]  99.54,136.53 0 bottom
LED_K25  Digital LED Reverse Mount  [IN-PI32TAR]  79.43,136.53 0 bottom
LED_K26  Digital LED Reverse Mount  [IN-PI32TAR]  59.32,136.53 0 bottom
LED_K27  Digital LED Reverse Mount  [IN-PI32TAR]  39.21,136.53 0 bottom
LED_K28  Digital LED Reverse Mount  [IN-PI32TAR]  19.09,136.53 0 bottom
LED_PG1  LED_RED_0603  [DIODE_0603]  35.2,109.64 90 top
LED_STAT1  LED_RED_0603  [DIODE_0603]  31.37,109.64 90 top
MK1  MP23ABS1TR  [MIC_MP23ABS1TR]  283.24,100.26 180 bottom
P2  ZIF-30  [FH34SRJ-30S-0-5SH-50]  191.87,114.83 180 bottom
P3  ZIF-30  [FH34SRJ-30S-0-5SH-50]  191.88,36.55 0 top
P4  ZH_2PH_SM4_2B  [S2B-PH-SM4-TB(LF)(SN)]  86.89,78.55 90 bottom
P5  MICRO_SD_CARD  [MEM2061-01-188-00-A_GCT]  250.41,104.11 180 top
R1  10K  [R0603]  80.03,187.5 0 bottom
R2  10K  [R0603]  80.03,185.36 0 bottom
R3  10K  [R0603]  92.37,185.73 180 bottom
R4  10K  [R0603]  80.03,189.63 0 bottom
R5  10K  [R0603]  273,76.9 0 bottom
R6  100K  [R0402]  273,72.94 180 bottom
R7  1K  [R0402]  271.08,72.39 90 bottom
R8  0R  [R0603]  277.1,78.35 180 bottom
R9  0R  [R0603]  60.98,202 0 bottom
R10  0R  [R0603]  93.29,202 0 bottom
R11  820R  [R0603]  268.89,65.32 270 bottom
R12  10K  [R0603]  271.02,62.12 270 bottom
R13  10K  [R0603]  271.17,55.72 270 bottom
R14  820R  [R0603]  273.31,58.92 270 bottom
R15  7K5  [R0603]  271.17,58.92 90 bottom
R16  100R  [R0603]  264.16,62.12 90 bottom
R17  7K5  [R0603]  273.31,55.72 270 bottom
R18  0R  [R0603]  127.88,202 0 bottom
R19  0R  [R0603]  167.35,196.52 0 bottom
R20  10R  [R0603]  262.99,47.52 180 bottom
R21  0R  [R0603]  252.7,204.14 0 bottom
R22  0R  [R0603]  232.73,204.29 0 bottom
R23  0R  [R0603]  220.24,199.39 0 bottom
R24  0R  [R0603]  192.09,206.58 180 bottom
R25  4K7  [R0603]  21.98,95.27 0 top
R26  0R  [R0603]  20.13,156.13 90 bottom
R27  0R  [R0603]  40.4,156.44 90 bottom
R28  0R  [R0603]  79.72,156.59 90 bottom
R29  0R  [R0603]  100.6,156.74 90 bottom
R30  0R  [R0603]  120.72,156.59 90 bottom
R31  0R  [R0603]  160.65,156.59 270 bottom
R32  0R  [R0603]  180.15,156.74 90 bottom
R33  220R  [R0603]  19.53,54.41 0 top
R34  DNI 0R  [R0603]  17.85,52.27 0 top
R35  0R  [R0603]  221.15,157.05 270 bottom
R36  10K  [R0603]  113.86,174.27 0 bottom
R37  10K  [R0603]  113.86,172.13 0 bottom
R38  0R  [R0603]  241.11,156.59 90 bottom
R39  0R  [R0603]  261.08,156.89 270 bottom
R40  0R  [R0603]  302.38,140.74 0 bottom
R41  0R  [R0603]  290.49,136.93 90 bottom
R42  0R  [R0603]  270.42,138.47 270 bottom
R43  0R  [R0603]  250.26,136.62 270 bottom
R44  0R  [R0603]  230.29,136.62 90 bottom
R45  0R  [R0603]  210.33,136.47 270 bottom
R46  0R  [R0603]  191.58,136.47 270 bottom
R47  0R  [R0603]  169.64,136.47 90 bottom
R48  0R  [R0603]  150.13,136.47 90 bottom
R49  0R  [R0603]  129.25,136.62 90 bottom
R50  0R  [R0603]  109.75,136.47 270 bottom
R51  10K  [R0603]  92.37,181.15 180 bottom
R52  10K  [R0603]  92.37,183.44 180 bottom
R53  10K  [R0603]  80.03,183.08 0 bottom
R54  10K  [R0603]  80.03,180.03 0 bottom
R55  10K  [R0603]  72.71,157.07 180 bottom
R56  10K  [R0603]  72.82,159.21 180 bottom
R57  10K  [R0603]  61.28,159.45 0 bottom
R58  10K  [R0603]  72.66,154.79 180 bottom
R59  0R  [R0603]  89.78,136.78 90 bottom
R60  10K  [R0603]  61.18,163.87 0 bottom
R61  10K  [R0603]  61.28,161.74 0 bottom
R62  10K  [R0603]  72.82,164.69 180 bottom
R63  10K  [R0603]  72.71,166.83 180 bottom
R64  820R  [R0603]  281.53,65.78 270 bottom
R65  10K  [R0603]  279.4,62.12 270 bottom
R66  10K  [R0603]  155.31,157.89 180 bottom
R67  10K  [R0603]  155.31,160.07 180 bottom
R68  10K  [R0603]  279.1,55.72 270 bottom
R69  820R  [R0603]  276.81,58.92 270 bottom
R70  7K5  [R0603]  279.1,58.92 90 bottom
R71  100R  [R0603]  286.13,62.2 270 bottom
R72  7K5  [R0603]  276.81,55.72 270 bottom
R73  270R  [R0603]  35.71,51.24 90 top
R74  10K  [R0603]  143.02,159.81 0 bottom
R75  10K  [R0603]  155.77,155.65 180 bottom
R76  0R  [R0603]  68.9,136.47 270 bottom
R77  10K  [R0603]  142.97,164.23 0 bottom
R78  10K  [R0603]  143.02,162.1 0 bottom
R79  10K  [R0603]  155.77,163.58 180 bottom
R80  10K  [R0603]  154.96,165.86 180 bottom
R81  10K  [R0603]  291.38,149.02 270 bottom
R82  10K  [R0603]  296.26,148.61 270 bottom
R83  10K  [R0603]  296.15,161.47 90 bottom
R84  10K  [R0603]  289.25,148.97 270 bottom
R85  0R  [R0603]  49.24,136.47 270 bottom
R86  10K  [R0603]  300.42,161.37 90 bottom
R87  10K  [R0603]  298.29,161.47 90 bottom
R88  10K  [R0603]  298.55,148.66 270 bottom
R89  10K  [R0603]  300.83,148.71 270 bottom
R90  10K  [R0603]  242.62,161.72 270 bottom
R91  10K  [R0603]  244.75,161.77 270 bottom
R92  0R  [R0603]  28.97,136.17 270 bottom
R93  10K  [R0603]  240.48,161.67 270 bottom
R94  0R  [R0603]  293.13,201.82 180 bottom
R95  10K DNI  [R0603]  36.46,83.08 90 bottom
R96  10K  [R0603]  126.81,171.68 180 bottom
R97  10K  [R0603]  113.86,176.4 0 bottom
R98  1M  [R0603]  67.09,87.03 0 bottom
R99  0R  [R0603]  17.85,45.87 0 top
R100  0R  [R0603]  17.85,50.14 0 top
R101  DNI 0R  [R0603]  17.85,48 0 top
R102  10K DNI  [R0603]  43.06,73.78 180 bottom
R103  10K DNI  [R0603]  267.96,78.2 90 bottom
R104  47K  [R0603]  251.93,103.5 270 bottom
R105  47K  [R0603]  249.09,103.5 270 bottom
R106  47K  [R0603]  246.39,103.34 270 bottom
R107  47K  [R0603]  257.57,103.5 270 bottom
R108  47K  [R0603]  254.72,103.5 270 bottom
R109  10K  [R0603]  304.84,89.32 270 bottom
R110  220K  [R0603]  234.71,67.22 90 bottom
R111  4K7  [R0603]  234.86,78.95 90 bottom
R112  4K7 DNI  [R0603]  236.99,79.11 90 bottom
R113  4K7  [R0603]  239.68,79.11 90 bottom
R114  10K  [R0603]  286.8,89.28 270 bottom
R115  10K  [R0603]  266.31,62.04 270 bottom
R116  10K  [R0603]  283.84,62.2 90 bottom
R117  33K  [R0603]  297.13,58.67 0 bottom
R118  33K  [R0603]  293.93,65.83 0 bottom
R119  22K  [R0603]  299.87,60.62 270 bottom
R120  22K  [R0603]  297.13,65.83 0 bottom
R121  66K5  [R0603]  74.71,85.66 180 bottom
R124  10K  [R0603]  71.51,85.66 180 bottom
R125  33R  [R0603]  9.33,80.64 180 top
R126  10R  [R0603]  13.6,65.55 180 top
R127  47K  [R0603]  309.08,168.86 270 bottom
R128  4K7  [R0603]  311.22,171.54 90 bottom
R129  20K  [R0603]  311.52,176.38 270 bottom
R130  100K  [R0402]  305.6,72.26 0 bottom
R131  49K9  [R0603]  305.14,70.58 0 bottom
R132  10K  [R0603]  126.81,167.41 180 bottom
R133  10K  [R0603]  126.81,169.54 180 bottom
R134  10K  [R0603]  113.86,170 0 bottom
R135  10K  [R0603]  40.82,80.19 180 bottom
R136  20K  [R0603]  297.72,74.15 180 bottom
R137  10K  [R0603]  297.72,78.42 0 bottom
R138  1K  [R0402]  300.47,77.96 180 bottom
R139  20K  [R0603]  293.46,74.15 0 bottom
R140  10K  [R0603]  38.59,83.08 90 bottom
R141  10K  [R0603]  43.05,75.93 180 bottom
R142  10K  [R0603]  293.51,78.49 180 bottom
R143  1K  [R0402]  290.56,77.96 0 bottom
R144  820R  [R0603]  302.04,85.13 90 bottom
R145  10K  [R0603]  299.86,89.24 90 bottom
R146  10K  [R0603]  299.55,95.64 90 bottom
R147  820R  [R0603]  297.42,92.44 90 bottom
R148  7K5  [R0603]  299.55,92.44 270 bottom
R149  100R  [R0603]  305.6,92.58 270 bottom
R150  7K5  [R0603]  297.42,95.64 90 bottom
R151  820R  [R0603]  289.19,85.58 90 bottom
R152  10K  [R0603]  291.32,89.24 90 bottom
R153  10K  [R0603]  291.63,95.64 90 bottom
R154  820R  [R0603]  293.91,92.44 90 bottom
R155  7K5  [R0603]  291.63,92.44 270 bottom
R156  100R  [R0603]  284.57,89.32 90 bottom
R157  7K5  [R0603]  293.91,95.64 90 bottom
R158  4K7  [R0603]  35.81,90.05 90 bottom
R159  4K7  [R0603]  38.1,90.05 90 bottom
R160  4K7  [R0603]  43.05,78.14 0 bottom
R161  10K  [R0603]  113.86,167.26 0 bottom
R162  10K  [R0603]  304.53,78.05 270 bottom
S1  SWITCH_SPDTSIDE_MOUNT_PTH  [SK-12F17-G7]  69.89,108.55 0 top
SCREW_1  SCREW_TERMINALM3_OLD  [T34069_OLD]  49.88,18.56 180 top
SCREW_2  SCREW_TERMINALM3_OLD  [T34069_OLD]  269.88,106.52 0 top
SCREW_3  SCREW_TERMINALM3_OLD  [T34069_OLD]  313.88,32.55 270 top
SCREW_4  SCREW_TERMINALM3_OLD  [T34069_OLD]  269.88,18.56 180 top
SCREW_5  SCREW_TERMINALM3_OLD  [T34069_OLD]  313.88,92.55 270 top
SCREW_6  SCREW_TERMINALM3_OLD_ADJ2  [T34069_OLD_ADJ2]  159.87,206.2 0 bottom
SCREW_7  SCREW_TERMINALM3_OLD  [T34069_OLD]  5.86,32.55 90 top
SCREW_8  SCREW_TERMINALM3_OLD_ADJ1  [T34069_OLD_ADJ1]  159.87,118.24 180 bottom
SCREW_9  SCREW_TERMINALM3_OLD  [T34069_OLD]  49.88,106.52 0 top
SCREW_10  SCREW_TERMINALM3_OLD  [T34069_OLD]  5.86,92.55 90 top
SW1  Chompi Encoder  [PEC11_SILK]  102.9,180.84 0 top
SW2  Chompi Encoder  [PEC11_SILK]  136.42,180.84 0 top
SW3  Chompi Encoder  [PEC11_SILK]  169.94,180.84 0 top
SW4  Chompi Encoder  [PEC11_SILK]  69.39,180.84 0 top
SW5  Chompi Encoder  [PEC11_SILK]  210.09,81.55 0 top
SW6  Chompi Encoder  [PEC11_SILK]  300.65,180.84 0 top
SW7  SWITCH_DPDT  [MSS6-V-T/R]  50.89,94.76 0 bottom
SW_NORMAL  Vertical Slide Switch ON ON  [ES_100SP1T6B11M2QEH_SMALL]  18.38,180.84 90 top
T1  10K NTC THERM  [R0603]  112.81,65.5 270 bottom
TP1  TPTP20R  [TP20R]  62.56,88.89 0 bottom
TP2  TPTP20R  [TP20R]  44.59,83.13 0 top
TP3  TPTP20R  [TP20R]  34.73,93.97 0 bottom
TP4  TPTP13R  [TP13R]  48.04,87.19 0 top
TP12  TPTP20R  [TP20R]  16.73,99.02 0 bottom
TP13  TPTP20R  [TP20R]  46.56,78.57 0 bottom
TP14  TPTP20R  [TP20R]  58.75,83.54 0 bottom
TP15  TPTP20R  [TP20R]  31.73,85.36 0 bottom
TP16  TPTP20R  [TP20R]  100.72,95.41 0 bottom
TP17  TPTP20R  [TP20R]  95.84,95.21 0 bottom
TP18  TPTP20R  [TP20R]  47.43,72.8 0 bottom
TP19  TPTP20R  [TP20R]  16.77,96.26 0 bottom
TP20  TPTP20R  [TP20R]  57.13,98.24 0 bottom
U1  ES_DAISY_SEED2_DFM_REV1""  [ES_DAISY_SEED2_DFM_REV1]  222.4,33.15 90 bottom
U2  MCP6004  [TSSOP-14]  275.13,67.76 0 bottom
U3  ST1S03PUR  [DFN06_3X3_STM]  314.04,172.34 270 bottom
U4  LD1117-5V  [SOT223]  255.89,54.68 180 bottom
U5  4021D  [SO-16]  86.2,184.48 90 bottom
U6  OPTO ISOLATOR  [DIL06_GULLWING]  27.61,49.68 270 top
U7  4021D  [SO-16]  66.65,159.69 270 bottom
U8  4021D  [SO-16]  149.5,159.99 270 bottom
U9  4021D  [SO-16]  296.48,154.78 0 bottom
U10  4021D  [SO-16]  242.99,168.24 0 bottom
U11  LMR62421XMFX/NOPB  [MF05A]  71.06,88.4 0 bottom
U12  PCM3060  [TSSOP-28]  239.74,72.55 180 bottom
U13  MP2722 Buck Charger  [MP2722]  44.42,86.14 0 bottom
U14  4021D  [SO-16]  120.72,171.52 90 bottom
U15  USB3740B-AI9-TR  [QFN10_1P6X2P1MC_MCH]  22.75,98.16 0 top
U16  MCP6004  [TSSOP-14]  295.59,83.6 180 bottom
U17  TPA6110 MSOP-8  [MSOP_8_PWRPAD]  294.87,62.32 180 bottom
U$1  LP346384  [LP346384]  196.38,32.94 0 bottom

## Library data of the parts
C1 C31 C33 C35 C85 C97 = Electrosmith-Misc
C2 C3 C5 C7-C9 C11 C17-C22 C25-C28 C30 C32 C37 C40 C48-C52 C55 C57-C83 C87 C88 C92 C93 C95 C98 C99 C107-C111 FB1 FB2 FB4 FB6 L4 R6 R7 R130 R138 R143 T1 = Electrosmith-Passives
C4 C6 C10 C12-C16 C29 C36 C39 C42-C47 C53 C54 C56 C84 C86 C96 C100 C102 C104 C113 = Electrosmith-Passives; PACKAGE: C0603
C23 C24 C34 C38 C41 C89-C91 C94 C103 C105 C106 C112 = Electrosmith-Passives; PACKAGE: C0805
C101 = Electrosmith-Passives; PACKAGE: C1206
D1-D6 = Electrosmith-Semiconductors; PACKAGE: SOD-323
D7 = Electrosmith-Semiconductors; PACKAGE: SMA
FD1-FD12 FDB1-FDB3 FDT1-FDT3 HANDLE_1 HANDLE_2 P2-P4 SCREW_1-SCREW_10 TP1-TP4 TP12-TP20 = Electrosmith-Connectors
J1 = Electrosmith-Connectors; DESCRIPTION: USB-C (USB TYPE-C) USB 3.2 Gen 2 (USB 3.1 Gen 2, Superspeed + (USB 3.1)) Receptacle Connector 24 Position Surface Mount, Right Angle; Through Hole; DIGIKEY_PART_NUMBER: 2057-USB-C31-S-RA-CS2-SMT-BK-T/RTR-ND; MF: Adam Tech; MP: USB-C31-S-RA-CS2-SMT-BK-T/R; PACKAGE: None; PURCHASE-URL: https://pricing.snapeda.com/search?q=USB-C31-S-RA-CS2-SMT-BK-T/R&ref=eda
J_AUDIO_IN J_AUDIO_OUT J_HP_OUT J_MIDI_IN J_MIDI_OUT = Electrosmith-Connectors; AVAILABILITY: Unavailable; CUI_PURCHASE_URL: https://www.cui.com/product/interconnect/audio-connectors/jacks/3.5-mm-jacks/sj2-3586x-smt-series?utm_source=snapeda.com&utm_medium=referral&utm_campaign=snapedaBOM; DESCRIPTION: 3 conductors, 3.5mm, SMT Audio Jack w/ Tip Switch; MF: CUI Inc.; MP: SJ2-35863B1-SMT-TR; PACKAGE: None; PRICE: None
KEY1-KEY28 LED3 LED6-LED9 P5 S1 SW1-SW7 = Electrosmith-Interface
L2 L3 = Electrosmith-Passives; IPN: 3.3UH 1008 Inductor; MPN: AIML-1008HC-3R3M-T
LED1 LED2 LED4 LED5 LED10 = Electrosmith-Interface; IPN: WS2812D-F8
LED_K2-LED_K9 LED_K12-LED_K28 = Electrosmith-Interface; IPN: Digital LED Reverse Mount
LED_PG1 LED_STAT1 = Electrosmith-Interface; COLOR: RED; MPN: APT1608EC
MK1 = Electrosmith-Interface; DIGI-KEY_PART_NUMBER: 497-18092-2-ND; IPN: MP23ABS1TR; MF: STMicroelectronics; MPN: MP23ABS1TR
R1-R5 R8-R121 R124-R129 R131-R137 R139-R142 R144-R162 = Electrosmith-Passives; PACKAGE: R0603
SW_NORMAL = og-switch
U1 = Electrosmith-Boards
U2 U16 = Electrosmith-IC; BIN#: N/A; IPN: MCP6004 TSSOP-14; MPN: MCP6004T-E/ST; PACKAGE: TSSOP-14
U3 = Electrosmith-Power; COPYRIGHT: Copyright (C) 2021 Ultra Librarian. All rights reserved.; IPN: ST1S03 DFN6D; MFR_NAME: STMicroelectronics; MPN: ST1S03PUR
U4 = Electrosmith-Power; BIN#: 12-025; IPN: LD1117-5V; MPN: LD1117S50CTR; PACKAGE: SOT-223
U5 U7-U10 U14 = Electrosmith-IC; BIN#: 16-015; IPN: CD4021 SO-16; MPN: CD4021BM96; PACKAGE: SO-16
U6 = Electrosmith-IC; MPN: H11L1SR2M
U11 = Electrosmith-Power; COPYRIGHT: Copyright (C) 2023 Ultra Librarian. All rights reserved.; DIGIKEY_PART_NUMBER_1: 296-48595-1-ND; DIGIKEY_PART_NUMBER_2: 296-48595-2-ND; DIGIKEY_PART_NUMBER_3: 296-48595-6-ND; DIGIKEY_PART_NUMBER_4: LMR62421XMFX/NOPB-ND; MANUFACTURER_PART_NUMBER: LMR62421XMFX/NOPB; MFR_NAME: Texas Instruments
U12 U17 = Electrosmith-IC
U13 = Electrosmith-Power; IPN: MP2722 Buck Charger
U15 = Electrosmith-IC; COPYRIGHT: Copyright (C) 2023 Ultra Librarian. All rights reserved.; DIGI-KEY_PART_NUMBER_1: USB3740B-AI9-TR-ND; DIGI-KEY_PART_NUMBER_2: USB3740B-AI9-TRCT-ND; DIGI-KEY_PART_NUMBER_3: USB3740B-AI9-TRDKR-ND; MANUFACTURER_PART_NUMBER: USB3740B-AI9-TR; MFR_NAME: Microchip
U$1 = Electrosmith-Power

## Nets
4021_OUT_A: U5.3 U7.11
4021_OUT_B: U7.3 U8.11
4021_OUT_C: U8.3 U9.11
4021_OUT_D: U9.3 U10.11
+3V3: C11.1 C18.2 C19.1 C20.1 C21.1 C22.1 C24.1 C26.1 C55.1 P2.P$11 P2.P$12 P3.P$11 P3.P$12 P5.P4 R1.2 R2.2 R3.2 R4.2 R36.2 R37.2 R51.2 R52.2 R53.2 R54.2 R55.2 R56.2 R57.2 R58.2 R60.2 R61.2 R62.2 R63.2 R66.2 R67.2 R73.2 R74.2 R75.2 R77.2 R78.2 R79.2 R80.2 R81.2 R82.2 R83.2 R84.2 R86.2 R87.2 R88.2 R89.2 R90.2 R91.2 R93.2 R96.2 R97.2 R104.2 R105.2 R106.2 R107.2 R108.2 R111.2 R112.2 R125.1 R130.2 R132.2 R133.2 R134.2 R161.2 U1.A3 U1.A4 U5.16 U6.6 U7.16 U8.16 U9.16 U10.16 U12.7 U12.15 U14.16 U15.7
+3V3_A: C8.1 C110.+ C112.1 C113.1 MK1.5 U1.A5
+4V5_LED: C2.1 C3.1 C9.1 C17.1 C25.1 C27.1 C49.1 C50.1 C51.1 C52.1 C57.1 C58.1 C59.1 C61.1 C64.1 C65.1 C66.1 C67.1 C68.1 C69.1 C70.1 C71.1 C72.1 C73.1 C74.1 C75.1 C76.1 C77.1 C78.1 C79.1 C80.1 C82.1 C83.1 C87.1 C88.1 C90.1 C98.+ L2.2 LED1.VDD LED2.VDD LED3.VDD LED4.VDD LED5.VDD LED6.VDD LED7.VDD LED8.VDD LED9.VDD LED10.VDD LED_K2.VDD LED_K3.VDD LED_K4.VDD LED_K5.VDD LED_K6.VDD LED_K7.VDD LED_K8.VDD LED_K9.VDD LED_K12.VDD LED_K13.VDD LED_K14.VDD LED_K15.VDD LED_K16.VDD LED_K17.VDD LED_K18.VDD LED_K19.VDD LED_K20.VDD LED_K21.VDD LED_K22.VDD LED_K23.VDD LED_K24.VDD LED_K25.VDD LED_K26.VDD LED_K27.VDD LED_K28.VDD R129.1
+5V_PRE: C93.+ C94.1 C99.+ FB4.2 FB6.2
+5V_USB: J1.A4 J1.A9 J1.B4 J1.B9 SW7.A SW7.F
+5V_USB_BMC: C102.1 SW7.B TP20.TP U13.IN
AREF_+2V5: C5.2 C37.2 C40.2 R17.2 R72.2 R150.2 R157.2 U2.10 U2.13 U2.14 U16.10 U16.12
AUDIO_IN_AMP_LEFT1: C6.2 R5.2 R103.1
AUDIO_IN_AMP_LEFT2: C38.2 R136.2
AUDIO_IN_AUX_L: C38.1 J_AUDIO_IN.2 R162.2
AUDIO_IN_AUX_R: C41.1 J_AUDIO_IN.3
AUDIO_OUT_HP_BUFF_L: C53.1 R16.1
AUDIO_OUT_HP_BUFF_R: C54.1 R71.1
AUDIO_OUT_HP_L: C62.- J_HP_OUT.2
AUDIO_OUT_HP_R: C63.- J_HP_OUT.3
AUDIO_OUT_M_L: J_AUDIO_OUT.2 R149.1
AUDIO_OUT_M_R: J_AUDIO_OUT.3 R156.1
BATT_P: C101.2 P4.P_2 TP15.TP U13.BATT U13.BATTSNS
BATT_THERM: R135.1 T1.1 U13.NTC1
CODEC_DEMP [DATA]: R112.1 R113.1 U12.2
CODEC_FMT [DATA]: R111.1 U12.1
CODEC_IN_L: R7.2 U1.D1
CODEC_OUT_L+ [CODEC]: R12.2 U1.D5
CODEC_OUT_L- [CODEC]: R13.2 U1.D4
CODEC_OUT_R+ [CODEC]: R65.2 U1.D6
CODEC_OUT_R- [CODEC]: R68.2 U1.D7
CODEC_VCC: C7.1 C23.1 C28.1 C48.1 C60.2 C108.+ C109.1 FB6.1 U2.4 U12.24 U16.4 U17.6
CODEC_VCOM: R8.1 U1.D3
DETECT: J_AUDIO_IN.10 R130.1 R131.1
DETECT_MCU: C111.1 R131.2 U1.C6
ENC_1_A: R97.1 SW1.B U14.7
ENC_1_B: R36.1 SW1.A U14.6
ENC_1_SW: R4.1 SW1.E U5.7
ENC_2_A: R37.1 SW2.B U14.5
ENC_2_B: R134.1 SW2.A U14.4
ENC_2_SW: R1.1 SW2.E U5.6
ENC_3_A: R96.1 SW3.B U14.13
ENC_3_B: R133.1 SW3.A U14.14
ENC_3_SW: R2.1 SW3.E U5.5
ENC_4_A: R132.1 SW4.B U14.15
ENC_4_B: R161.1 SW4.A U14.1
ENC_4_SW: R53.1 SW4.E U5.4
ENC_5_A: SW5.B U1.D9
ENC_5_B: SW5.A U1.C3
ENC_5_SW: SW5.E U1.B4
ENC_6_A_BOT: P3.P$7 U1.C7
ENC_6_A_TOP: P2.P$7 SW6.B
ENC_6_B_BOT: P3.P$8 U1.C5
ENC_6_B_TOP: P2.P$8 SW6.A
ENC_6_SW: R93.1 SW6.E U10.7
EXT_CODEC_IN_L [CODEC]: R138.2 U12.25
EXT_CODEC_IN_R: R143.2 U12.26
EXT_CODEC_OUT_L+: R145.2 U12.20
EXT_CODEC_OUT_L-: R146.2 U12.19
EXT_CODEC_OUT_R+: R152.2 U12.18
EXT_CODEC_OUT_R-: R153.2 U12.17
EXT_CODEC_VCOM: C29.1 C30.1 U12.21
GND: C2.2 C3.2 C5.1 C7.2 C8.2 C9.2 C11.2 C13.2 C16.2 C17.2 C18.1 C19.2 C20.2 C21.2 C22.2 C23.2 C24.2 C25.2 C26.2 C27.2 C28.2 C29.2 C30.2 C32.2 C34.2 C37.1 C40.1 C44.2 C47.2 C48.2 C49.2 C50.2 C51.2 C52.2 C55.2 C56.1 C57.2 C58.2 C59.2 C60.1 C61.2 C64.2 C65.2 C66.2 C67.2 C68.2 C69.2 C70.2 C71.2 C72.2 C73.2 C74.2 C75.2 C76.2 C77.2 C78.2 C79.2 C80.2 C81.- C82.2 C83.2 C85.2 C86.1 C87.2 C88.2 C89.2 C90.2 C91.2 C92.- C93.- C94.2 C95.- C96.1 C97.2 C98.- C99.- C101.1 C102.2 C103.1 C104.2 C105.2 C106.2 C107.- C108.- C109.2 C110.- C111.2 C112.2 C113.2 D5.A J1.A1 J1.A12 J1.B1 J1.B12 J_AUDIO_IN.1 J_AUDIO_OUT.1 J_HP_OUT.1 J_MIDI_IN.1 J_MIDI_OUT.1 KEY1.P$2 KEY2.P$2 KEY3.P$2 KEY4.P$2 KEY5.P$2 KEY6.P$2 KEY7.P$2 KEY8.P$2 KEY9.P$2 KEY10.P$2 KEY11.P$2 KEY12.P$2 KEY13.P$2 KEY14.P$2 KEY15.P$2 KEY16.P$2 KEY17.P$2 KEY18.P$2 KEY19.P$2 KEY20.P$2 KEY21.P$2 KEY22.P$2 KEY23.P$2 KEY24.P$2 KEY25.P$2 KEY26.P$2 KEY27.P$2 KEY28.P$2 LED1.GND LED2.GND LED3.GND LED4.GND LED5.GND LED6.GND LED7.GND LED8.GND LED9.GND LED10.GND LED_K2.GND LED_K3.GND LED_K4.GND LED_K5.GND LED_K6.GND LED_K7.GND LED_K8.GND LED_K9.GND LED_K12.GND LED_K13.GND LED_K14.GND LED_K15.GND LED_K16.GND LED_K17.GND LED_K18.GND LED_K19.GND LED_K20.GND LED_K21.GND LED_K22.GND LED_K23.GND LED_K24.GND LED_K25.GND LED_K26.GND LED_K27.GND LED_K28.GND MK1.2 MK1.3 MK1.4 P2.P$16 P2.P$17 P2.P$18 P2.P$19 P2.P$20 P3.P$16 P3.P$17 P3.P$18 P3.P$19 P3.P$20 P4.P_1 P5.11 P5.12 P5.P6 R25.1 R103.2 R109.2 R110.1 R113.2 R114.2 R115.2 R116.2 R124.1 R127.2 R128.2 R162.1 SW1.C SW1.D SW2.C SW2.D SW3.C SW3.D SW4.C SW4.D SW5.C SW5.D SW6.C SW6.D SW_NORMAL.O T1.2 TP1.TP TP2.TP U1.A6 U1.A7 U1.A8 U1.A9 U1.A10 U2.11 U3.2 U3.7 U4.1 U5.8 U5.11 U6.5 U7.8 U8.8 U9.8 U10.8 U11.2 U12.8 U12.16 U12.22 U12.23 U12.27 U13.AGND U13.PGND U14.8 U14.11 U15.5 U15.10 U16.11 U17.2 U17.3 U17.9
HEADPHONE_IN_L1: C12.1 C33.2 R15.1 U2.7
HEADPHONE_IN_L2: C1.2 C43.1 R148.1 U16.7
HEADPHONE_IN_R1: C15.1 C35.2 R70.1 U2.1
HEADPHONE_IN_R2: C31.2 C46.1 R155.1 U16.1
I2C1_SCL: R158.1 TP16.TP U1.B7 U13.SCL
I2C1_SDA: R159.1 TP17.TP U1.B8 U13.SDA
KEY_1: KEY1.P$1 R63.1 U7.1
KEY_2: KEY2.P$1 R58.1 U7.7
KEY_3: KEY3.P$1 R55.1 U7.6
KEY_4: KEY4.P$1 R56.1 U7.5
KEY_5: KEY5.P$1 R62.1 U7.4
KEY_6: KEY6.P$1 R75.1 U8.7
KEY_7: KEY7.P$1 R66.1 U8.6
KEY_8: KEY8.P$1 R67.1 U8.5
KEY_9: KEY9.P$1 R79.1 U8.4
KEY_10: KEY10.P$1 R74.1 U8.13
KEY_11: KEY11.P$1 R84.1 U9.7
KEY_12: KEY12.P$1 R81.1 U9.6
KEY_13: KEY13.P$1 R82.1 U9.5
KEY_14: KEY14.P$1 R88.1 U9.4
KEY_15: KEY15.P$1 R83.1 U9.13
KEY_16: KEY16.P$1 R54.1 U5.1
KEY_17: KEY17.P$1 R57.1 U7.13
KEY_18: KEY18.P$1 R61.1 U7.14
KEY_19: KEY19.P$1 R60.1 U7.15
KEY_20: KEY20.P$1 R78.1 U8.14
KEY_21: KEY21.P$1 R77.1 U8.15
KEY_22: KEY22.P$1 R80.1 U8.1
KEY_23: KEY23.P$1 R87.1 U9.14
KEY_24: KEY24.P$1 R86.1 U9.15
KEY_25: KEY25.P$1 R89.1 U9.1
KEY_26: KEY26.P$1 R52.1 U5.14
KEY_27: KEY27.P$1 R90.1 U10.6
KEY_28: KEY28.P$1 R91.1 U10.5
MIC_OUT: C6.1 MK1.1
MIDI_IN_A: R33.1 R34.2 R99.2
MIDI_IN_B: D1.A R100.2 R101.2 U6.2
MIDI_IN_RING: J_MIDI_IN.3 R99.1 R101.1
MIDI_IN_TIP: J_MIDI_IN.2 R34.1 R100.1
N$2: R110.2 U12.28
N$3: LED9.DOUT R94.1
N$4: C1.1 R109.1 R149.2
N$5: C31.1 R114.1 R156.2
N$6: C33.1 R16.2 R115.1
N$7: C35.1 R71.2 R116.1
N$8 [DATA]: C53.2 R117.2
N$9 [DATA]: C54.2 R118.2
N$10: C4.1 R6.1 R7.1 U2.8
N$11: C4.2 R5.1 R6.2 U2.9
N$12: LED10.DIN R94.2
N$13: C81.+ C86.2 C96.2 R8.2 U2.12
N$14: LED8.DOUT R21.2
N$15: C12.2 R11.1 U2.6
N$16: LED5.DOUT R24.1
N$17: C100.1 U13.BST U13.BST_2
N$18: LED1.DOUT R9.2
N$19: LED2.DIN R9.1
N$20: LED2.DOUT R10.2
N$21: LED3.DIN R10.1
N$22: LED3.DOUT R18.2
N$23: LED4.DIN R18.1
N$24: LED4.DOUT R19.2
N$25: LED5.DIN R19.1
N$26: LED9.DIN R21.1
N$27: LED7.DOUT R22.2
N$28: LED8.DIN R22.1
N$29: LED6.DOUT R23.2
N$30: LED7.DIN R23.1
N$31: LED6.DIN R24.2
N$32: D2.C FB2.1
N$33: LED_K5.DO R30.1
N$34: R135.2 U13.VRNTC
N$35: FB1.1 R20.2
N$36: LED_K2.DIN R26.1
N$37: LED_K2.DO R27.2
N$38: LED_K3.DIN R27.1
N$39: LED_K3.DO R28.2
N$40: LED_K4.DIN R28.1
N$41: LED_K4.DO R29.2
N$42: LED_K5.DIN R29.1
N$43: LED_K13.DIN R39.1
N$44: D6.C R20.1
N$45: LED_K6.DIN R30.2
N$46: C13.1 R14.1 U2.5
N$47 [DATA]: R117.1 R119.2 U17.8
N$48 [DATA]: R118.1 R120.2 U17.4
N$49 [DATA]: C56.2 U17.1
N$50: C10.1 R13.1 R14.2 R17.1
N$51 [DATA]: C62.+ R119.1 U17.7
N$52: C10.2 R11.2 R12.1 R15.2
N$53: C15.2 R64.1 U2.2
N$54: C16.1 R69.1 U2.3
N$55: C14.1 R68.1 R69.2 R72.1
N$56: C14.2 R64.2 R65.1 R70.2
N$57 [DATA]: C63.+ R120.1 U17.5
N$58: LED_K6.DO R31.2
N$59: LED_K7.DIN R31.1
N$60: LED_K7.DO R32.2
N$61: LED_K14.DIN R40.1
N$62: LED_K18.DIN R44.1
N$63: LED_K19.DIN R45.1
N$64: LED_K23.DIN R49.1
N$65: C32.1 C34.1 C92.+ FB1.2 U4.3
N$66: LED_K24.DIN R50.1
N$67: LED_K13.DO R40.2
N$68: LED_K15.DO R42.1
N$69: C84.2 R121.1 R124.2 U11.3
N$71: LED_K12.DIN R38.1
N$72: LED_K12.DO R39.2
N$73: LED_K14.DO R41.2
N$74: LED_K18.DO R45.2
N$75: LED_K19.DO R46.2
N$76: LED_K23.DO R50.2
N$77: LED_K24.DO R59.2
N$78: LED_K15.DIN R41.1
N$79: LED_K20.DO R47.1
N$80: LED_K16.DIN R42.2
N$81: LED_K16.DO R43.2
N$82: LED_K17.DIN R43.1
N$83: LED_K17.DO R44.2
N$84: LED_K20.DIN R46.1
N$85: LED_K25.DIN R59.1
N$86: D1.C R33.2 U6.1
N$87: LED_K9.DO R38.2
N$89: LED_K8.DIN R32.1
N$90: LED_K9.DIN R35.1
N$91: LED_K25.DO R76.1
N$92: LED_K21.DIN R47.2
N$93: LED_K21.DO R48.2
N$94: C36.1 R137.1 R138.1 U16.8
N$95: C36.2 R136.1 R137.2 U16.9
N$96: C39.1 R142.1 R143.1 U16.14
N$97: C39.2 R139.1 R142.2 U16.13
N$98: C41.2 R139.2
N$99: C43.2 R144.1 U16.6
N$100: C44.1 R147.1 U16.5
N$101: C42.1 R146.1 R147.2 R150.1
N$102: C42.2 R144.2 R145.1 R148.2
N$103: C46.2 R151.1 U16.2
N$104: C47.1 R154.1 U16.3
N$105: C45.1 R153.1 R154.2 R157.1
N$106: C45.2 R151.2 R152.1 R155.2
N$107: LED_K22.DIN R48.1
N$108: LED_K22.DO R49.2
N$109: LED_K8.DO R35.2
N$110: LED_STAT1.CATHODE R140.1
N$111: LED_PG1.CATHODE R141.1
N$112: D4.A D7.A L4.P$2 U11.1
N$114: C89.1 FB2.2 U3.4 U3.5
N$116: LED_K26.DIN R76.2
N$117: LED_K26.DO R85.2
N$118: LED_K27.DIN R85.1
N$119: LED_K27.DO R92.2
N$120: LED_K28.DIN R92.1
N$121: R127.1 R128.1 R129.2 U3.1
N$122: D5.C L2.1 U3.3
N$123: J_MIDI_OUT.3 R125.2
N$124: J_MIDI_OUT.2 R126.2
N$126: R98.1 U11.4
NONE: R3.1 U5.13
PG: R102.2 R141.2 U13.PG/NTC2
PMID: C103.2 TP4.TP U13.PMID
POW_INT: R160.1 TP18.TP U1.C10 U13.INT
SAI2_FS: U1.D10 U12.4 U12.11
SAI2_MCLK: U1.E1 U12.6 U12.9
SAI2_SCK: U1.E4 U12.5 U12.10
SAI2_SD_A: U1.E3 U12.12
SAI2_SD_B: U1.E2 U12.3
SD_CK: P5.P5 U1.E5
SD_CMD: P5.P3 R104.1 U1.E6
SD_D0: P5.P7 R108.1 U1.E7
SD_D1: P5.P8 R107.1 U1.E8
SD_D2: P5.P1 R106.1 U1.E9
SD_D3: P5.P2 R105.1 U1.E10
SPI1_MISO_BOT: P3.P$3 U1.B1
SPI1_MISO_TOP: P2.P$3 U10.3
SPI1_NSS_BOT: P3.P$1 U1.B6
SPI1_NSS_TOP: P2.P$1 U5.9 U7.9 U8.9 U9.9 U10.9
SPI1_SCK_BOT: P3.P$2 U1.B2
SPI1_SCK_TOP: P2.P$2 U5.10 U7.10 U8.10 U9.10 U10.10
SPI6_MISO_BOT: P3.P$23 U1.C2
SPI6_MISO_TOP: P2.P$23 U14.3
SPI6_NSS_BOT: P3.P$21 U1.C8
SPI6_NSS_TOP: P2.P$21 U14.9
SPI6_SCK_BOT: P3.P$22 U1.C9
SPI6_SCK_TOP: P2.P$22 U14.10
STAT: R95.2 R140.2 U13.STAT/IB U13.STAT/IB_2
SW: C100.2 L3.2 TP13.TP U13.SW
SW_TOG: R51.1 SW_NORMAL.P U5.15
TIM3_CH2_BOT: P3.P$4 U1.C4
TIM3_CH2_TOP: P2.P$4 R26.2
TIM5_CH4_BOT: P3.P$5 U1.C1
TIM5_CH4_TOP: LED1.DIN P2.P$5
USART1_RX: R73.1 U1.B5 U6.4
USART1_TX: R126.1 U1.B3
USB_CC1: J1.A5 U13.CC1
USB_CC2: J1.B5 U13.CC2 U13.CC2_2
USB_IN_MCU_N: U1.B10 U15.9
USB_IN_MCU_P: U1.B9 U15.8
USB_IN_N: J1.A7 J1.B7 U15.1
USB_IN_P: J1.A6 J1.B6 U15.2
USB_IN_POW_N: TP19.TP U13.D- U15.3
USB_IN_POW_P: TP12.TP U13.D+ U15.4
USB_SW: R25.2 U1.D8 U15.6
V_REG_2: C91.1 FB4.1 U4.2 U4.TAB
VBOOST: C84.1 C97.1 D2.A D3.A D4.C D6.A D7.C P2.P$28 P2.P$29 P2.P$30 P3.P$28 P3.P$29 P3.P$30 R121.2
VBOOST_FILT: C95.+ D3.C U1.A1 U1.A2
VCC: C104.1 LED_PG1.ANODE LED_STAT1.ANODE R95.1 R102.1 R158.2 R159.2 R160.2 TP3.TP U13.VCC
VSYS: C85.1 L4.P$1 R98.2 S1.P$1 U11.5
VSYS_BMC: C105.1 C106.1 C107.+ L3.1 SW7.D TP14.TP U13.SYS
VSYS_SW: S1.P$2 SW7.E

## Tracks (layer width: path | path; a pad name or v marks a point on that pad's centre or on a via)
4021_OUT_A  (via drill 0.35)
  Top 0.203: v83.69,158.26 62.2,158.26 v62.03,158.1
  Bottom 0.203: U5.3 84.37,182.57 85.21,181.73 85.21,159.79 v83.69,158.26 | U7.11 62.35,157.78 v62.03,158.1
4021_OUT_B  (via drill 0.35)
  Top 0.203: v67.53,161.62 130.17,161.62 133.44,158.35 v143.27,158.35
  Bottom 0.203: U7.3 67.56,161.59 v67.53,161.62 | v143.27,158.35 143.54,158.08 U8.11
4021_OUT_C  (via drill 0.35)
  Top 0.203: v150.28,161.01 162.93,161.01 v163.09,160.86 | v294.61,155.22 293.03,153.64 283.58,153.64 v283.48,153.74 | v162.93,148.51 170.86,148.51 172.84,146.53 183.35,146.53 185.79,148.97 189.6,148.97 191.89,146.68 196.31,146.68 198.59,148.97 228.92,148.97 230.93,146.96 235.29,146.96 238.52,150.19 239.99,150.19 240.96,149.22 248.9,149.22 251.64,146.48 262.92,146.48 266.32,149.88 v267.78,149.88
  Bottom 0.203: U8.3 151.17,161.89 v150.28,161.01 | U9.11 294.58,155.24 v294.61,155.22 | v163.09,160.86 162.93,160.7 v162.93,148.51 | v267.78,149.88 268.39,149.88 272.2,146.07 282.57,146.07 283.48,146.99 v283.48,153.74
4021_OUT_D  (via drill 0.35)
  Top 0.203: v298.42,150.64 296.38,152.68 282.62,152.68 276.62,146.68 271.69,146.68 269.15,149.22 266.16,149.22 263.06,146.12 251.47,146.12 248.73,148.87 240.81,148.87 240.1,149.58 v239.59,149.58
  Bottom 0.203: U10.11 241.09,169.33 240.54,168.78 238.22,168.78 237.3,167.87 237.3,154.3 239.59,152.02 v239.59,149.58 | v298.42,150.64 298.39,150.67 U9.3
+3V3  (via drill 0.35)  (1 unrouted)
  Top 0.305: P3.P$11 189.63,35.39 189.62,35.37 | P3.P$12 190.13,35.43 190.08,35.37
  Top 0.406: v64.03,169.08 v73.63,169.08 v87.95,169.08 112.95,169.08 | 112.95,169.08 143.58,169.08 v145.1,167.56 146.47,166.19 166.29,166.19 v166.44,166.34 | v166.44,161.16 192.8,161.16 195.09,158.87 226.43,158.87 226.94,159.38 234.87,159.38 235.37,158.87 237,158.87 v238.98,160.86 240.2,162.07 294,162.07 v294.45,161.62 | U15.7 23.77,97.13 v24.12,96.79 | v238.09,79.72 237.48,79.11 237.48,75.76 | 238.09,75.76 238.09,74.35 v238.53,73.91 | v238.53,73.91 239.42,73.02 v243.88,73.02 | 112.95,169.08 113.01,169.02 v113.01,168.48 | v238.53,73.91 232.43,73.91 225.13,66.62 v182.16,66.62 v20,66.62 | R73.2 35.58,52.23 C18.2 34,52.22 U6.6 29.68,52.22 27.79,54.12 v23.66,54.12 | C26.1 237.48,75.76 | 237.48,75.76 238.09,75.76 | 238.09,75.76 238.33,76 C24.1 | v20,80.64 R125.1 | v167.35,126.72 167.35,131.9 v166.44,132.81 | v182.16,35.37 189.62,35.37 190.08,35.37 | v257.56,101.52 v254.66,101.52 v251.92,101.52 | v251.92,101.52 v249.17,101.52 246.58,101.52 v246.43,101.36 | P5.P4 251.76,101.67 v251.92,101.52
  Top 0.508: v226.25,82.92 v234.89,82.92 | v243.69,101.36 v246.43,101.36
  Bottom 0.305: P2.P$12 190.12,113.76 | 189.62,113.76 P2.P$11
  Bottom 0.406: U7.16 64.06,165.39 C19.1 | R57.2 R61.2 60.33,161.84 R60.2 60.33,164.93 60.85,165.46 C19.1 | C19.1 63.99,169.05 v64.03,169.08 | v87.95,169.08 87.95,177.74 87.99,177.77 | U5.16 88.37,179.62 C11.1 88.37,178.16 87.99,177.77 | R54.2 79.27,180.12 79.27,182.99 R53.2 R2.2 R1.2 R4.2 79.18,190.48 79.42,190.73 92.83,190.73 93.29,190.27 93.29,185.79 R3.2 R52.2 R51.2 93.22,178.32 92.68,177.77 87.99,177.77 | R58.2 73.51,157.02 R55.2 73.56,159.11 R56.2 R62.2 73.67,166.73 R63.2 73.56,169.02 v73.63,169.08 | R74.2 R78.2 142.17,164.18 R77.2 142.12,165.03 142.82,165.73 | U8.16 146.34,164.44 145.98,164.8 C20.1 145.85,165.73 142.82,165.73 | 142.82,165.73 144.65,167.56 v145.1,167.56 145.71,168.17 153.96,168.17 155.81,166.32 R80.2 156.62,165.05 R79.2 156.16,163.12 R67.2 R66.2 156.62,157.43 R75.2 160.5,151.78 160.5,143.79 166.44,137.84 v166.44,132.81 | C22.1 248.53,170.83 U10.16 247.44,168.4 248.43,167.41 248.43,161.22 247.36,160.16 245.51,160.16 R91.2 244.7,160.87 R90.2 240.53,160.87 R93.2 239.02,160.82 v238.98,160.86 | v166.44,161.16 v166.44,166.34 | R84.2 291.33,148.12 R81.2 293.9,148.17 | 293.87,148.21 293.9,148.17 | 293.9,148.17 294.31,147.76 R82.2 298.5,147.76 R88.2 300.78,147.81 R89.2 301.88,147.86 303.75,149.73 303.75,156.59 | 303.75,156.59 302.9,157.44 C21.1 302.24,157.37 U9.16 | 303.75,156.59 303.75,159.85 301.39,162.22 R86.2 300.32,162.32 R87.2 R83.2 | R83.2 295.61,162.32 | v294.45,161.62 295.15,162.32 R83.2 | v24.12,96.79 24.07,96.74 24.07,95.98 20,91.91 v20,80.64 v20,66.62 20,57.98 23.66,54.32 v23.66,54.12 | R96.2 R133.2 R132.2 127.66,166.58 126.2,165.12 C55.1 123.5,166.89 U14.16 122.42,166.19 113.4,166.19 113.01,166.58 R161.2 v113.01,168.48 R134.2 R37.2 R36.2 R97.2
  Bottom 0.406: v238.09,79.72 237.23,79.72 R112.2 235.01,79.96 | R111.2 235.01,79.96 | 234.89,80.08 235.01,79.96 | v243.88,73.02 243.96,72.93 U12.15 | U12.7 239.41,74.8 v238.53,73.91 | v182.16,35.37 v182.16,66.62 | v167.35,126.72 167.35,116.66 170.25,113.76 189.62,113.76 190.12,113.76 | R130.2 305.1,73.58 307.64,76.12 307.64,104.96 305.85,106.75 264.11,106.75 260.01,102.65 R107.2 v257.57,101.53 v257.56,101.52 | v246.43,101.36 246.39,101.4 R106.2 | R105.2 249.09,101.6 v249.17,101.52 | R104.2 251.93,101.53 v251.92,101.52 | R108.2 254.72,101.58 v254.66,101.52
  Bottom 0.508: R111.2 234.86,80.05 234.89,80.08 v234.89,82.92 234.89,92.98 243.27,101.36 v243.69,101.36 | U1.A3 U1.A4 226.21,82.88 v226.25,82.92
+3V3_A  (via drill 0.35)
  Top 0.406: v222.54,81.55 222.59,81.6 235.55,81.6 236.87,82.92 240.47,82.92 241.29,82.11 241.29,79.72 243.57,77.44 247.99,77.44 249.01,78.45 259.42,78.45 262.83,81.86 v278.93,81.86
  Bottom 0.406: C8.1 284.12,98.94 MK1.5 284.07,98.12 278.93,92.98 v278.93,81.86 | U1.A5 222.6,81.61 v222.54,81.55 | C8.1 286.37,98.94 286.6,98.71 C112.1 | C8.1 285.59,101.05 C113.1 285.75,102.02 285.99,102.26 C110.+
+4V5_LED  (via drill 0.35)